# Altium PCB antennaArray.PcbDoc
Units mil, origin at the board's own origin, x right, y up, seen from the top; angles counter-clockwise.
Board outline 7000 x 3000 mil, 2 copper layers (Top Layer, Bottom Layer), stack 64.724 mil thick; 8 components, 8 nets, 18 pads, 0 vias.
Unrouted connection lines stored in the file: 3.
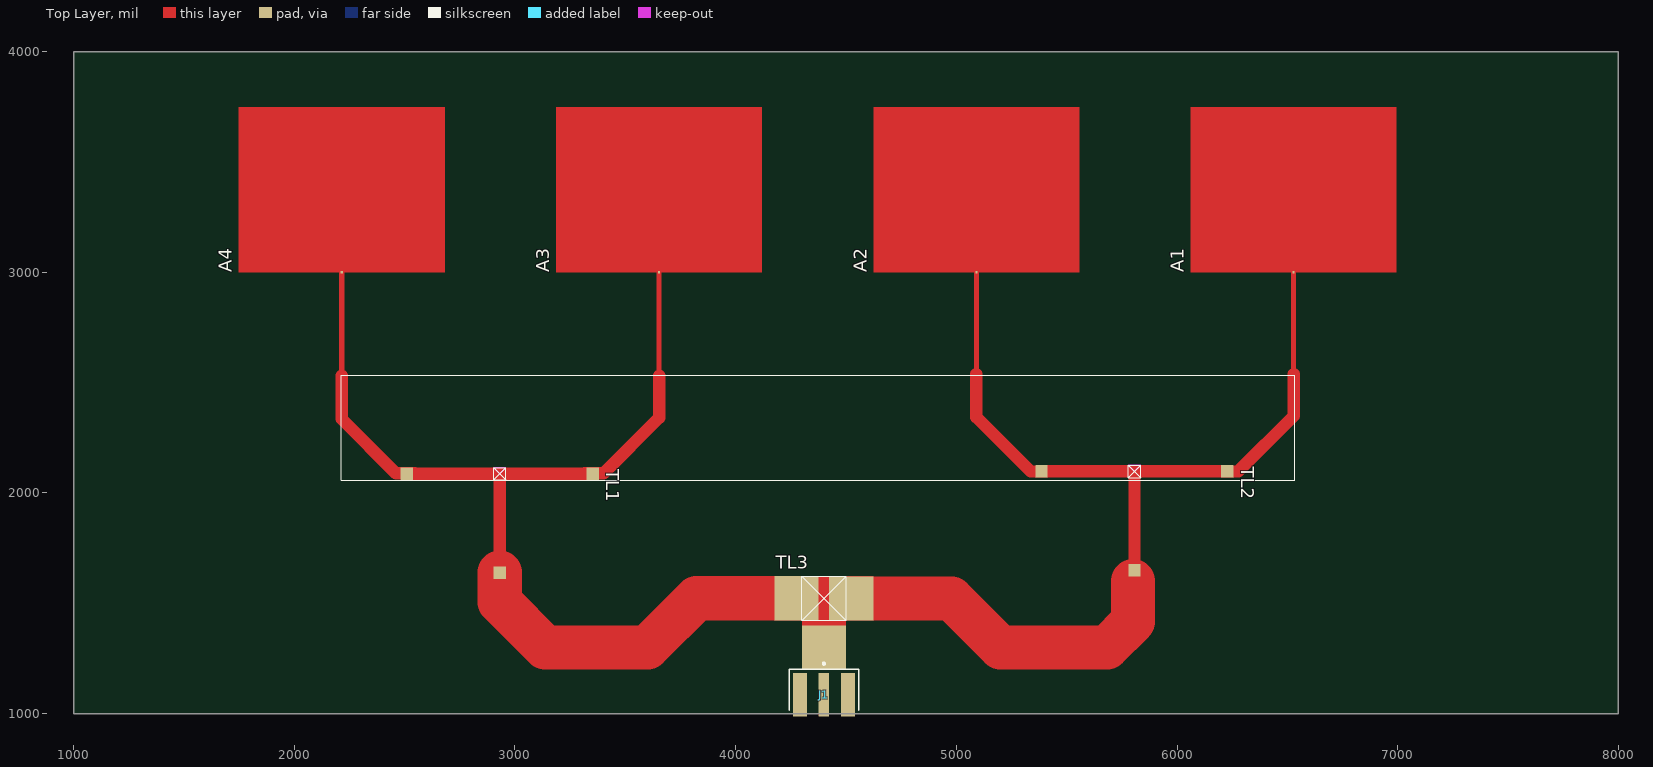
[diagram p0: Top Layer view]
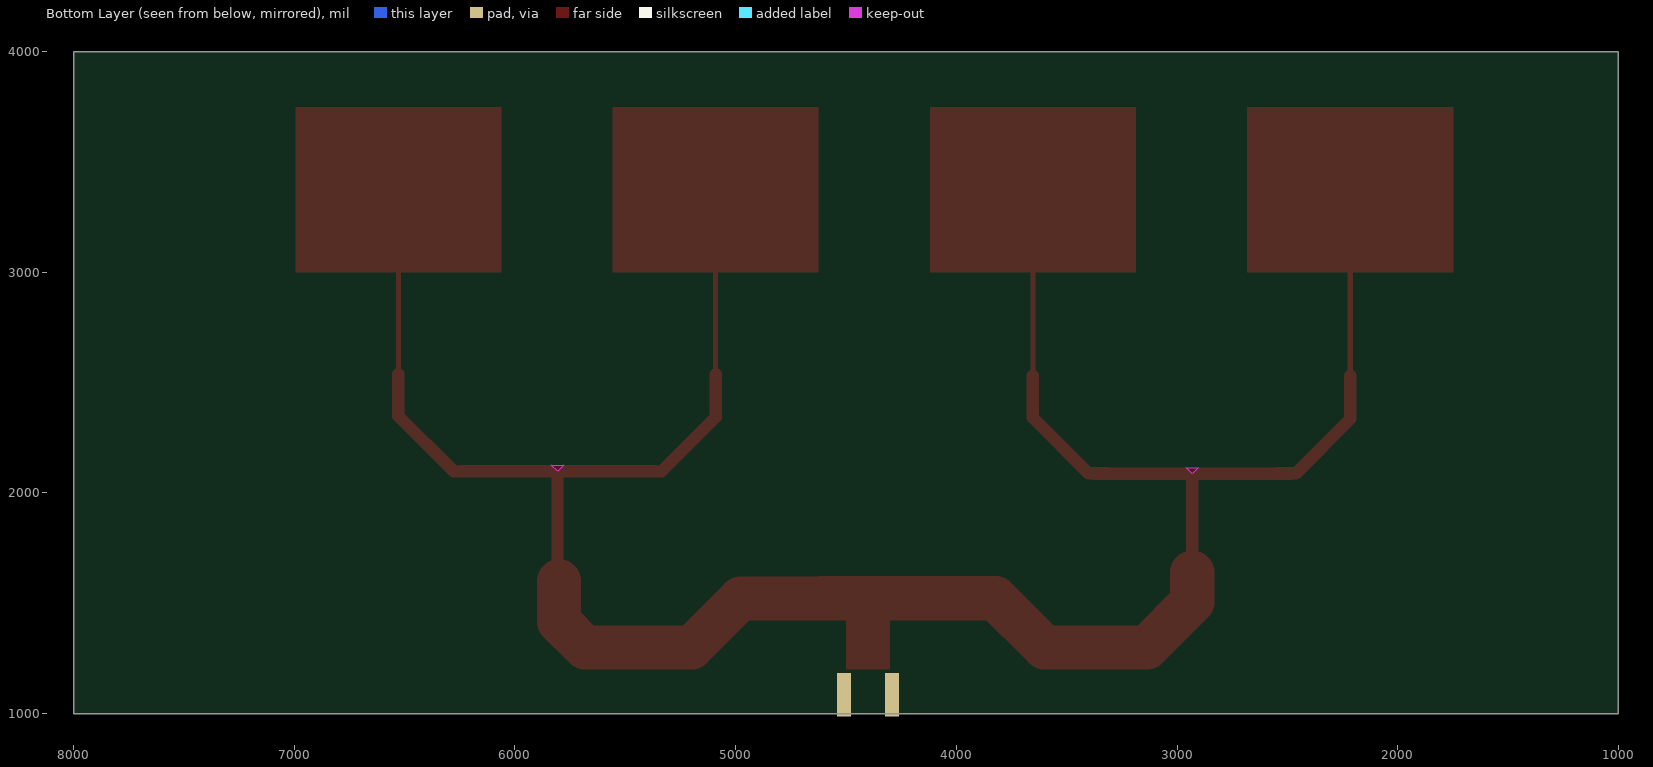
[diagram p1: Bottom Layer view, seen from below]

## Layer stack, top to bottom
Top Solder: solder mask 0.4, Solder Resist, Dk 3.5
Top Layer: signal copper 1.378
Dielectric 1: dielectric 61.9685, FR-4, Dk 2.2
Bottom Layer: signal copper 1.378
Bottom Solder: solder mask 0.4, Solder Resist, Dk 3.5

## Board outline
1000,1000 1000,4000 8000,4000 8000,1000

## Design rules (kind name [scope] priority, off if disabled: settings)
Clearance [All] p1: gap=10 ignorepadtopadclearanceinfootprint=FALSE except(0: Arc-Hole Track-Hole SMDPad-Hole THPad-Hole Via-Hole Fill-Hole Poly-Hole Region-Hole Text-Hole)
PolygonConnect [All] p1: connectstyle=Relief reliefconductorwidth=10 reliefentries=4 polygonreliefangle="90 Angle" airgapwidth=10
RoomDefinition antennaArray [InComponentClass('antennaArray')] p1: confinementstyle=ConfineIn formatcopy=TRUE lockcomponents=FALSE outline 7045,1065 10585,1065 10585,2110 7045,2110
RoutingVias [All] p1: holewidth=28 width=50 viastyle="Through Hole" minholewidth=28 minwidth=50 maxholewidth=28 maxwidth=50
SolderMaskExpansion [All] p1: expansion=4 istentingtop=FALSE
Width [All] p1: maxlimit=200 minlimit=10 preferedwidth=186 minimp=50.000000 maximp=50.000000 favimp=50.000000
30 further rules are at their usual default settings.

## Components (designator, comment, footprint, x,y, rotation, side; value= is the part's Value field where it differs from the comment)
A1 "Component_1" 5GHzPatch 6995,3000 r90 top locked
A2 "Component_1" 5GHzPatch 5558,3000 r90 top locked
A3 "Component_1" 5GHzPatch 4120,3000 r90 top locked
A4 "Component_1" 5GHzPatch 2682,3000 r90 top locked
J1 "CON-SMA-EDGE-S" FP-CON-SMA-EDGE-S-MFG 4400,800 r180 top
TL1 "100OhmTee" 100OhmTee 2482,2059 r0 top
TL2 "100OhmTee" 100OhmTee 5358,2070 r0 top
TL3 "50OhmTee" 50OhmTee 4400,1423 r0 top

## Footprints (in the part's own frame and the unit in brackets; to place one, negate y for a bottom-side part, rotate by r counter-clockwise, add the part's x,y. Pads: shape width x height; smd on the part's side, far side on the other; paste and mask are expansions set on the pad)
5GHzPatch [mil]
  rect 10x10 smd: 2(0,467)
  Top Layer region: 0,0 748,0 748,934 0,934
50OhmTee [mil]
  rect 200x200 smd: 1(-124,100) 2(124,99) 3(0,-123)
  Top Layer region: -224.5,0 224.5,0 224.5,200 -224.5,200
  Top Layer region: -100,-223 100,-223 100,1 -100,1
  Top Layer pour cut-out: -100,200 0,100 100,200
  silkscreen extent -100,1 100,200
100OhmTee [mil]
  rect 56x56 smd: 1(28,28) 2(870,28) 3(449,-420)
  Top Layer region: 0,0 898,0 898,56 0,56
  Top Layer region: 421,-448 477,-448 477,1 421,1
  Keep-Out Layer board cut-out: 421,56 449,28 477,56
  silkscreen extent 421,0 477,56
FP-CON-SMA-EDGE-S-MFG [mm]
  rect 1.2x5 smd paste+0 mask+0: 1(0,-7.26)
  rect 1.6x5 smd paste+0 mask+0: 2(-2.77,-7.26) 3(2.77,-7.26)
  rect 1.6x5 smd far side paste+0 mask+0: 4(-2.77,-7.26) 5(2.77,-7.26)
  silkscreen extent -4,-10.96 4,-5.5, body extent -3.67,-9.86 3.67,4.86, height 0.25

## Part data
J1: library part CMP-204357-000001-1, "CONN SMA JACK STR EDGE MNT", Frequency=18GHz, Manufacturer="RF Solutions Ltd.", Package=CONN_JACK, Automotive=No, Category=Conn, ComponentLink2Description=Datasheet, ComponentLink2URL=https://www.rfsolutions.co.uk/downloads/1498648656DS-CON-EDGE-SMA-4.pdf, Conn Orientation="Right Angle", Contact Material=Gold, Device Class L1=Connectors, Device Class L2="RF / Coaxial Connectors", Device Class L3=unset, Digikey Description="CONN SMA JACK STR EDGE MNT", Footprint Url=https://forum.upverter.com/uploads/default/original/3X/b/e/be75b907af57498775929d6d9099689c472e0307.pdf, Height=6.35mm, Impedance=50Ω, Is Female=yes, Lead Free=Yes, Manufacturer Part Number=CON-SMA-EDGE-S, Number of Contacts=1, Octopart=https://octopart.com/con-sma-edge-s-rf+solutions-70967450, RoHS=TRUE, Shielding=true

## Nets (pads, with @x,y where several pads share a name; then routed paths per layer and width w, separated by ;. In a path a pad name is that pad's centre, name@x,y a point inside that pad or via, vN(x,y) a via of type N, cw(c..) or ccw(c..) an arc to the next point about the centre after c; other vN are vias at no path point)
GND: J1.2 J1.3 J1.4 J1.5
NetA1_Port1: 
NetA2_Port1: 
NetA3_Port1: 
NetA4_Port1: 
NetJ1_1: J1.1
NetTL1_Port3: 
NetTL2_Port3: 
pads on no net: A1.2 A2.2 A3.2 A4.2 TL1.1 TL1.2 TL1.3 TL2.1 TL2.2 TL2.3 TL3.1 TL3.2 TL3.3
copper on no net: | length 7678.5
  Top Layer w23: 2215,2531 2215,3000 2215,3014 ; 3653,2531 3653,3000 ; 5091,2530.95 5091,3000 ; 6528,2551 6528,3000 ; 6528,3374 6550,3352
  Top Layer w56: 2215,2531 2215,2335 2461,2089 2547,2089 ; 3316,2089 3401,2089 3653,2341 3653,2531 ; 5091,2539 5091,2343 5337,2097 5423,2097 ; 6192,2097 6277,2097 6529,2349 6529,2539
  Top Layer w200: 2931,1639 2931,1506.49 3137.49,1300 3600,1300 3823,1523 4276,1523 ; 4524,1522 4978,1522 5200,1300 5400,1300 5682.84,1300 5800,1417.16 5800,1600

## Silkscreen, mask and mechanical layers (free items; w line width, h text height)
Top Overlay:
  lines w1: 6531,2533 2213,2533 ; 2213,2533 6533,2533 6533,2058 2213,2058 2213,2533
Top Solder:
  the board outline again, w1